# Altium PCB HX-SMJ01.pcbdoc (part 3 of 3)
Units mm, origin at the board's own origin, x right, y up, seen from the top; angles counter-clockwise.
Board outline 198.63 x 136.78 mm, 2 copper layers (Top Layer, Bottom Layer); 359 components, 358 nets, 1307 pads, 814 vias.
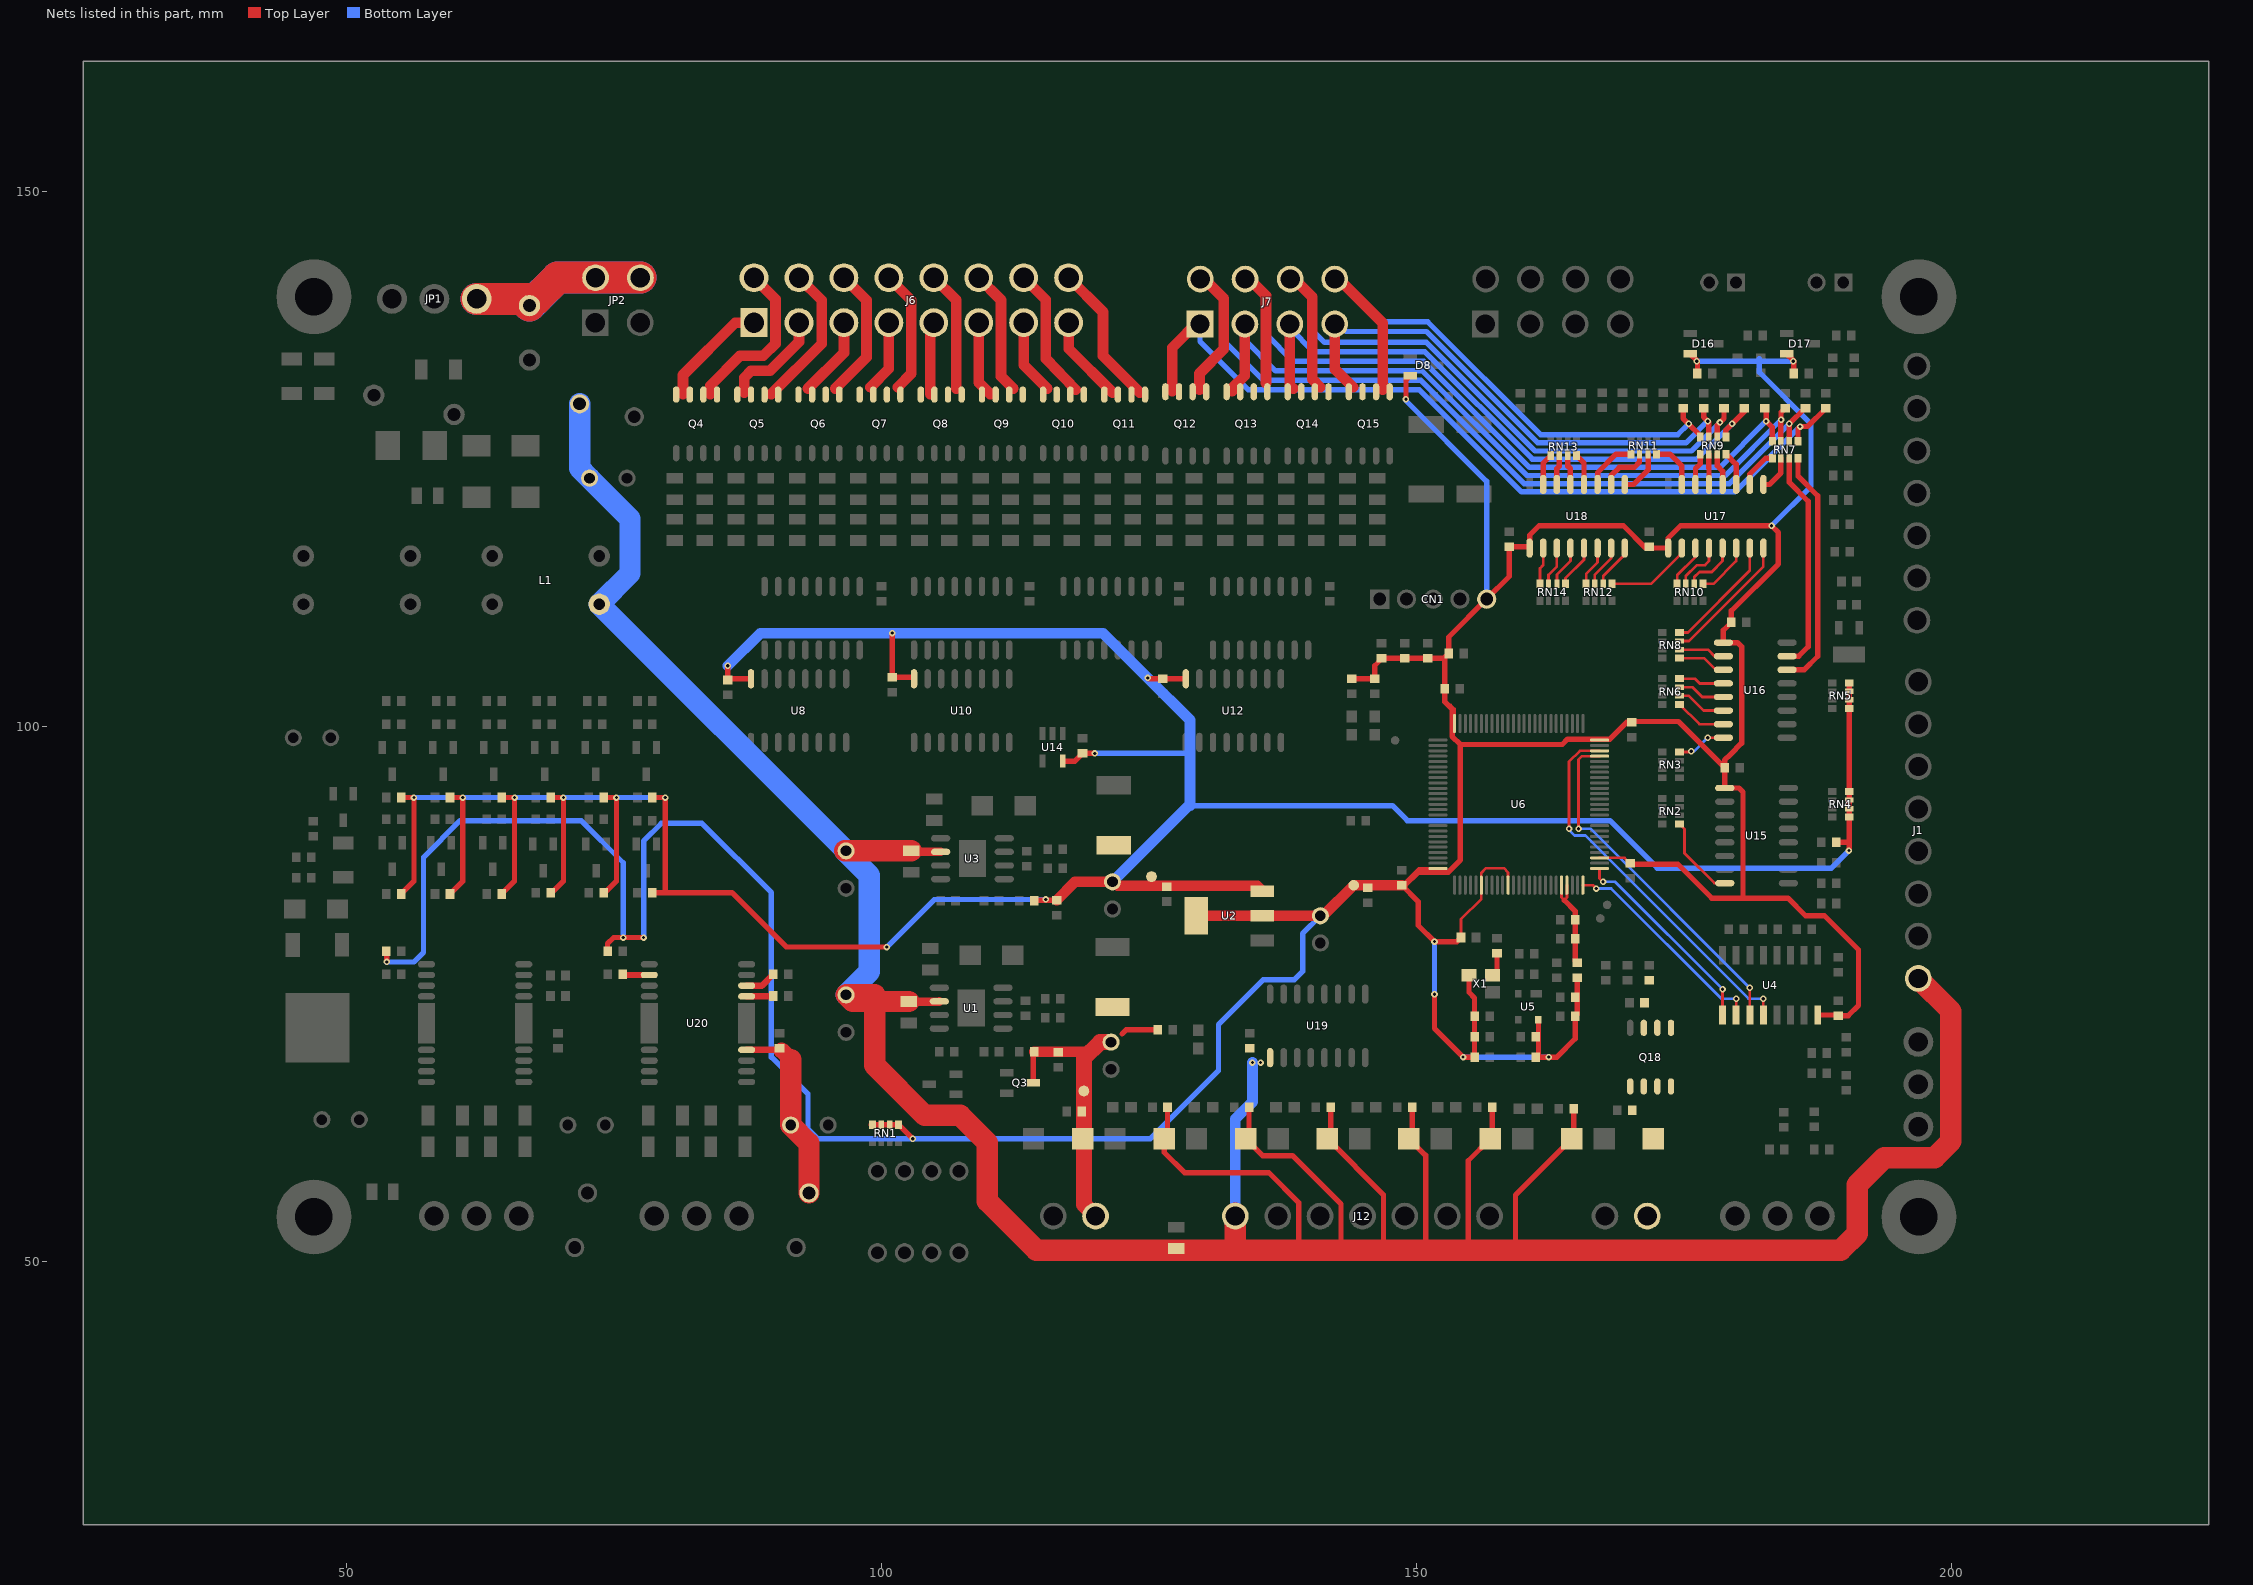
[diagram p3: the nets of this part, all layers, seen from the top]

## Via types
v1: diameter 0.61, hole 0.305, Top Layer to Bottom Layer, 814 vias

## Nets (pads, with @x,y where several pads share a name; then routed paths per layer and width w, separated by ;. In a path a pad name is that pad's centre, name@x,y a point inside that pad or via, vN(x,y) a via of type N, cw(c..) or ccw(c..) an arc to the next point about the centre after c; other vN are vias at no path point) (continued)
U15_16: RN2.5 U15.16 | length 7.8
  Top Layer w0.254: RN2.5@174.575,90.904 175.045,90.435 175.045,88.167 177.839,85.373 U15.16@178.804,85.373
U16_6: RN7.4 U16.6 | length 22.7
  Top Layer w0.5: U16.6@184.621,105.312 186.221,105.312 187.491,106.582 187.491,121.568 185.642,123.417 RN7.4@185.642,125.086
U16_7: RN7.3 U16.7 | length 20.7
  Top Layer w0.5: U16.7@184.621,106.582 185.713,106.582 186.602,107.471 186.602,121.06 184.844,122.82 RN7.3@184.844,125.086
U16_10: RN8.6 U16.10 | length 4.4
  Top Layer w0.254: RN8.6@174.575,107.198 177.222,107.199 177.839,106.582 U16.10@178.677,106.582
U16_11: RN8.5 U16.11 | length 4.6
  Top Layer w0.254: RN8.5@174.575,106.398 176.879,106.399 177.966,105.312 U16.11@178.677,105.312
U16_12: RN6.8 U16.12 | length 4.3
  Top Layer w0.254: RN6.8@174.575,104.479 176.025,104.479 176.465,104.042 U16.12@178.677,104.042
U16_13: RN6.7 U16.13 | length 4.5
  Top Layer w0.254: RN6.7@174.575,103.68 175.787,103.681 176.696,102.772 U16.13@178.677,102.772
U16_14: RN6.6 U16.14 | length 4.7
  Top Layer w0.254: RN6.6@174.575,102.88 175.444,102.881 176.823,101.502 U16.14@178.677,101.502
U16_15: RN6.5 U16.15 | length 4.9
  Top Layer w0.254: RN6.5@174.575,102.08 176.424,100.232 U16.15@178.677,100.232
U16_16: RN3.8 U16.16 | length 4.7
  Top Layer w0.254: RN3.8@174.575,97.621 175.609,97.621 v1(175.68,97.692) ; v1(177.204,98.962) U16.16@178.677,98.962
  Bottom Layer w0.254: v1(175.68,97.692) 175.934,97.692 v1(177.204,98.962)
U17_1: RN7.2 U17.1 | length 3.5
  Top Layer w0.5: U17.1@182.411,122.635 182.97,122.635 184.042,123.707 RN7.2@184.042,125.086
U17_2: RN7.1 U17.2 | length 3.7
  Top Layer w0.5: U17.2@181.141,122.635 181.141,123.6 182.627,125.086 RN7.1@183.244,125.086
U17_3: RN9.4 U17.3 | length 3.2
  Top Layer w0.5: RN9.4@178.911,125.467 179.871,124.507 U17.3@179.871,122.635
U17_4: RN9.3 U17.4 | length 3
  Top Layer w0.5: RN9.3@178.113,125.467 178.113,124.38 178.601,123.854 U17.4@178.601,122.635
U17_5: RN9.2 U17.5 | length 2.8
  Top Layer w0.5: RN9.2@177.311,125.467 U17.5@177.331,122.635
U17_6: RN9.1 U17.6 | length 3
  Top Layer w0.5: U17.6@176.061,122.635 176.061,124.108 176.513,124.56 RN9.1@176.513,125.467
U17_7: RN11.4 U17.7 | length 4.5
  Top Layer w0.5: RN11.4@172.434,125.467 173.686,125.467 174.791,124.362 U17.7@174.791,122.635
U17_10: RN12.5 U17.10 | length 8.2
  Top Layer w0.254: RN12.5@168.243,113.351 171.908,113.351 174.791,116.234 U17.10@174.791,116.691
U17_11: RN10.8 U17.11 | length 4
  Top Layer w0.254: RN10.8@174.354,113.351 174.354,114.146 176.061,115.853 U17.11@176.061,116.691
U17_12: RN10.7 U17.12 | length 4.7
  Top Layer w0.254: RN10.7@175.152,113.351 175.152,114.055 176.188,115.091 176.95,115.091 177.331,115.472 U17.12@177.331,116.691
U17_13: RN10.6 U17.13 | length 5.1
  Top Layer w0.254: RN10.6@175.953,113.351 175.954,113.968 176.442,114.456 177.585,114.456 178.601,115.472 U17.13@178.601,116.691
U17_14: RN10.5 U17.14 | length 5.2
  Top Layer w0.254: RN10.5@176.752,113.351 177.75,113.351 179.871,115.472 U17.14@179.871,116.691
U17_15: RN8.8 U17.15 | length 11.1
  Top Layer w0.254: RN8.8@174.575,108.797 175.355,108.797 181.141,114.583 U17.15@181.141,116.691
U17_16: RN8.7 U17.16 | length 12.4
  Top Layer w0.254: RN8.7@174.575,107.997 175.444,107.997 182.411,114.964 U17.16@182.411,116.691
U18_1: RN11.3 U18.1 | length 4.2
  Top Layer w0.5: U18.1@169.457,122.635 170.27,122.635 171.636,124.001 RN11.3@171.636,125.467
U18_2: RN11.2 U18.2 | length 4.7
  Top Layer w0.5: U18.2@168.187,122.635 168.187,123.473 168.949,124.235 170.346,124.235 170.834,124.725 RN11.2@170.834,125.467
U18_3: RN11.1 U18.3 | length 4.9
  Top Layer w0.5: U18.3@166.917,122.635 166.917,123.727 168.657,125.467 RN11.1@170.036,125.467
U18_4: RN13.4 U18.4 | length 3
  Top Layer w0.5: RN13.4@164.941,125.34 165.647,124.634 U18.4@165.647,122.635
U18_5: RN13.3 U18.5 | length 2.8
  Top Layer w0.5: RN13.3@164.143,125.34 164.143,124.344 164.377,124.108 U18.5@164.377,122.635
U18_6: RN13.2 U18.6 | length 2.8
  Top Layer w0.5: U18.6@163.107,122.635 163.107,124.108 163.341,124.342 RN13.2@163.341,125.34
U18_7: RN13.1 U18.7 | length 3
  Top Layer w0.5: U18.7@161.837,122.635 161.837,124.634 RN13.1@162.543,125.34
U18_10: RN14.8 U18.10 | length 3.1
  Top Layer w0.254: RN14.8@161.527,113.351 161.527,114.794 161.837,115.104 U18.10@161.837,116.31
U18_11: RN14.7 U18.11 | length 3.7
  Top Layer w0.254: RN14.7@162.325,113.351 162.325,114.184 163.107,114.964 U18.11@163.107,116.691
U18_12: RN14.6 U18.12 | length 3.9
  Top Layer w0.254: RN14.6@163.126,113.351 163.127,114.22 164.377,115.472 U18.12@164.377,116.691
U18_13: RN14.5 U18.13 | length 4.1
  Top Layer w0.254: RN14.5@163.925,113.351 163.925,113.877 165.647,115.599 U18.13@165.647,116.691
U18_14: RN12.8 U18.14 | length 3.8
  Top Layer w0.254: RN12.8@165.845,113.351 165.845,114.273 166.917,115.345 U18.14@166.917,116.691
U18_15: RN12.7 U18.15 | length 4
  Top Layer w0.254: RN12.7@166.643,113.351 166.643,114.184 168.187,115.726 U18.15@168.187,116.691
U18_16: RN12.6 U18.16 | length 4.2
  Top Layer w0.254: RN12.6@167.444,113.351 167.445,114.093 169.457,116.107 U18.16@169.457,116.691
U20_2: R124.2 U20.2 | length 2.5
  Top Layer w0.6: R124.2@75.797,76.864 75.868,76.793 U20.2@78.293,76.793
U20_12: C94.2 C95.1 F3.2 U20.12 | length 17.5
  Top Layer w0.6: U20.12@87.392,69.793 90.313,69.793 C94.2@90.463,69.94
  Top Layer w1.5: C94.2@90.664,69.739 91.507,68.896
  Top Layer w2: 91.507,68.897 C95.1@91.507,62.767 93.222,61.052 F3.2@93.222,56.427
U20_13: R126.1 U20.13 | length 2.5
  Top Layer w0.6: U20.13@87.392,74.791 89.851,74.791 R126.1@89.891,74.832
U20_14: R127.2 U20.14 | length 2.9
  Top Layer w0.6: U20.14@87.392,75.792 88.82,75.792 R127.2@89.891,76.864
USART1_RX_PA3: U4.9 U6.26 | length 19.1
  Top Layer w0.254: U6.26@167.1,86.74 167.1,85.825 v1(167.425,85.5) ; U4.9@178.601,73.049 v1(178.601,75.467)
  Bottom Layer w0.254: v1(167.425,85.5) 168.568,85.5 v1(178.601,75.467)
USART1_RX_PB11: U4.12 U6.48 | length 35.9
  Top Layer w0.254: v1(164.25,90.453) 164.25,96.724 165.266,97.74 U6.48@167.1,97.74 ; U4.12@182.411,73.049 v1(182.411,74.578)
  Bottom Layer w0.254: v1(164.25,90.453) 164.25,90.326 164.758,89.818 165.774,89.818 181.014,74.578 v1(182.411,74.578)
USART1_TX_PA2: U4.10 U6.25 | length 20.2
  Top Layer w0.254: U6.25@165.55,85.19 166.465,85.19 v1(166.79,84.865) ; U4.10@179.871,73.049 v1(179.871,74.578)
  Bottom Layer w0.254: v1(166.79,84.865) 168.187,84.865 178.474,74.578 v1(179.871,74.578)
USART1_TX_PB10: U4.11 U6.47 | length 33.3
  Top Layer w0.254: v1(165.139,90.453) 165.139,96.93 165.449,97.24 U6.47@167.1,97.24 ; U4.11@181.141,73.049 v1(181.141,75.594)
  Bottom Layer w0.254: v1(165.139,90.453) 166.282,90.453 v1(181.141,75.594)
VCC: F1.1 JP1.1 JP2.2 JP2.4 | length 33.6
  Top Layer w3: JP1.1@62.167,139.983 F1.1@66.46,139.983 ; F1.1@67.095,139.348 F1.1@66.46,139.983 ; JP2.4@77.461,141.957 69.704,141.957 67.73,139.983 F1.1@66.46,139.983
  Bottom Layer w3: JP1.1@62.167,139.983 66.46,139.983 F1.1@67.095,139.348 69.704,141.957 JP2.4@77.461,141.957
VDD_3V3: C21.1 C22.2 C30.1 C37.1 C38.1 C39.2 C40.1 C41.1 C42.2 C43.1 C44.1 C45.1 C46.1 C47.1 C48.1 C62.2 C72.2 C81.2 C90.2 CN1.5 D8.2 D16.2 D17.2 pad.1@144.118,85.18 R10.2 R15.2 R16.2 R17.2 R18.2 R22.2 R24.1 R122.2 R123.2 R132.2 R135.2 RN1.1 RN1.2 RN1.3 RN1.4 U2.2 U2.4 U4.16 U5.4 U6.6 U6.11 U6.28 U6.50 U6.75 U6.100 U15.9 U16.9 U17.9 U18.9 X1.1 X1.4 | length 498.8
  Top Layer w0.254: C45.1@148.629,85.18 150.186,86.74 U6.100@152.001,86.739 ; 152.914,102.043 153.168,102.043 153.552,101.66 U6.75@153.552,100.288 ; C48.1@154.151,80.293 154.151,82.005 156.051,83.905 U6.6@156.051,84.809 ; U6.6@156.051,85.189 156.051,86.348 156.473,86.77 158.154,86.77 158.55,86.374 U6.11@158.55,85.952 ; U6.28@167.1,87.738 169.442,87.738 C46.1@169.965,87.217 ; U6.50@167.1,98.739 167.963,98.739 169.65,100.425 C43.1@170.092,100.425
  Top Layer w0.5: R123.2@53.694,79.023 53.76,78.957 v1(53.76,78.007) ; R122.2@74.395,79.023 74.395,79.719 74.969,80.293 v1(75.858,80.293) v1(77.763,80.293) ; RN1.4@99.043,62.805 101.568,62.805 102.876,61.497 v1(102.909,61.497) ; R10.2@143.93,104.489 146.089,104.489 146.089,105.693 146.785,106.389 R16.2@148.883,106.389 ; R17.2@146.724,106.389 151.042,106.389 152.627,106.389 C44.1@152.627,103.534 ; v1(149.01,130.585) 149.01,132.409 D8.2@149.411,132.81 ; v1(151.677,74.98) 151.677,71.784 v1(154.344,69.117) 155.421,69.117 155.421,74.647 X1.1@154.895,75.175 X1.4@154.895,76.775 ; C48.1@154.151,80.293 153.77,79.912 v1(151.677,79.912) 150.153,81.436 150.153,83.659 148.629,85.18 148.944,85.18 150.153,86.389 152.947,86.389 154.09,87.532 154.09,98.327 ; U5.4@161.39,72.616 161.39,69.366 R18.2@161.141,69.117 v1(162.345,69.117) 163.107,69.117 164.824,70.834 C42.2@164.824,72.927 165.012,73.115 R24.1@165.012,76.544 ; C46.1@169.965,87.217 170.031,87.151 171.489,87.151 174.41,87.151 177.585,83.976 180.506,83.976 ; D16.2@175.573,134.842 176.249,134.167 R132.2@176.249,132.998 ; 182.03,83.976 180.506,83.976 ; D17.2@184.59,134.842 185.266,134.167 R135.2@185.266,132.998 ; U4.16@187.491,73.049 189.335,73.049 189.396,72.988 190.346,72.988 191.301,73.943 191.301,79.15 188.126,82.325 186.348,82.325 184.697,83.976 180.506,83.976 ; C44.1@152.627,103.534 152.627,106.455 153.008,106.836 153.008,108.375 CN1.5@156.551,111.916 158.662,114.027 158.662,116.803 160.455,116.803 U18.9@160.567,116.691 160.567,117.885 161.456,118.774 169.33,118.774 171.413,116.691 U17.9@173.521,116.691 173.521,117.631 174.664,118.774 v1(183.173,118.774) 183.808,118.139 183.808,115.218 179.424,110.834 179.424,109.757 178.677,109.01 U16.9@178.677,107.852 179.998,107.852 180.379,107.471 180.379,98.454 179.333,97.408 178.789,96.864 C62.2@178.789,96.168 ; C44.1@152.627,103.534 152.627,102.33 153.328,101.629 153.328,99.089 154.09,98.327 ; 154.09,98.327 163.615,98.327 164.123,98.835 168.06,98.835 168.398,99.173 169.65,100.425 170.092,100.425 170.092,100.486 171.489,100.486 174.471,100.486 C62.2@178.789,96.168 ; C62.2@178.789,96.168 U15.9@178.804,94.263 180.125,94.263 180.506,93.882 180.506,83.976
  Top Layer w1: U2.4@129.401,82.325 C21.1@141.009,82.325 ; C21.1@140.438,82.325 141.263,82.325 pad.1@144.118,85.18 C45.1@148.629,85.18
  Bottom Layer w0.5: v1(53.76,78.007) 56.31,78.007 57.189,78.886 57.189,87.786 60.618,91.215 71.921,91.215 75.858,87.278 v1(75.858,80.293) ; v1(77.763,80.293) 77.763,89.31 79.414,90.961 83.224,90.961 89.701,84.484 89.701,69.117 93.13,65.688 93.13,62.386 94.019,61.497 v1(102.909,61.497) 125.134,61.497 131.484,67.847 131.484,72.165 135.675,76.356 138.596,76.356 139.358,77.118 139.358,80.674 C21.1@141.009,82.325 ; v1(149.01,130.585) 149.01,130.458 156.55,122.918 CN1.5@156.551,111.916 ; v1(151.677,74.98) v1(151.677,79.912) ; v1(154.344,69.117) v1(162.345,69.117) ; v1(176.188,134.141) v1(185.205,134.141) ; 182.035,134.395 182.035,133.12 186.856,128.299 186.856,122.457 v1(183.173,118.774)
VDD_5V: C23.1 C24.2 C25.2 C52.1 C54.1 C55.1 C58.1 L4.2 pad.1@125.226,85.986 R9.2 R80.2 R92.1 R93.1 R94.1 R95.2 R96.2 R97.2 R107.1 R108.1 R109.1 R110.2 R111.2 R112.2 RN4.5 RN4.6 RN4.7 RN4.8 RN5.5 RN5.6 RN5.7 RN5.8 U2.3 U8.16 U10.16 U12.16 U14.5 | length 323.4
  Top Layer w0.5: R108.1@55.096,84.357 56.3,85.561 v1(56.3,93.374) R111.2@55.096,93.374 ; R107.1@59.668,84.357 60.872,85.561 v1(60.872,93.374) R110.2@59.668,93.374 ; R109.1@64.494,84.357 65.698,85.561 v1(65.698,93.374) R112.2@64.494,93.374 ; R93.1@69.066,84.357 70.27,85.561 v1(70.27,93.374) R96.2@69.066,93.374 ; R92.1@74.019,84.357 75.223,85.561 v1(75.223,93.374) R95.2@74.019,93.374 ; R94.1@78.565,84.484 86.018,84.484 91.098,79.404 v1(100.496,79.404) ; R97.2@78.591,93.374 v1(79.795,93.374) 79.795,84.484 ; v1(85.637,105.693) 85.637,104.362 85.749,104.474 U8.16@87.796,104.474 ; v1(101.004,108.741) 101.004,104.616 102.894,104.616 U10.16@103.036,104.474 ; R9.2@114.278,83.722 114.342,83.788 C25.2@116.371,83.788 ; U14.5@116.93,96.778 118.063,96.778 118.784,97.499 v1@119.927,97.499 ; v1(124.88,104.55) 124.941,104.489 126.277,104.489 U12.16@128.436,104.474 ; R80.2@189.208,89.183 190.45,89.183 ; v1(190.412,88.421) 190.45,88.459 RN4.5@190.45,91.539 RN4.8@190.45,93.938 ; RN4.8@190.45,94.192 RN5.6@190.45,102.499 ; RN5.5@190.45,101.699 RN5.8@190.45,104.098
  Top Layer w1: C25.2@116.371,83.788 118.083,85.5 C23.1@121.578,85.5 ; C23.1@122.086,85.119 135.104,85.119 U2.3@135.599,84.624
  Bottom Layer w0.5: v1(56.3,93.374) v1(79.795,93.374) ; v1(100.496,79.404) 104.941,83.849 v1(115.355,83.849) ; v1(119.927,97.5) 128.817,97.5 ; 128.69,92.612 147.74,92.612 149.137,91.215 168.06,91.215 172.505,86.77 188.761,86.77 v1(190.412,88.421)
  Bottom Layer w1: v1(85.637,105.693) 88.685,108.741 120.689,108.741 v1(124.88,104.55) 128.817,100.613 128.817,92.612 ; C23.1@121.578,85.5 128.69,92.612
VDD_12V: C12.1 C13.2 C14.2 D6.1 J11.2 L3.2 pad.1@118.911,65.946 Q3.3 R6.2 R140.1 | length 31.4
  Top Layer w0.5: Q3.3@114.192,66.704 114.192,69.539 R6.2@114.278,69.625 ; 122.467,71.276 122.848,71.657 R140.1@125.83,71.657
  Top Layer w1: R6.2@114.278,69.625 119.546,69.625 120.435,70.514
  Top Layer w1.5: J11.2@120.002,54.258 118.911,55.35 pad.1@118.911,65.946 118.911,68.99 120.435,70.514 C12.1@121.451,70.514
VDD_24V: C3.1 C4.2 C11.2 C15.1 C20.2 C26.1 C91.2 C93.2 D10.1 D11.1 D12.1 D13.1 D14.1 D15.1 F2.1 J1.1 J12.1 L1.4 Q18.1 Q18.2 Q18.3 R83.1 R86.2 R87.2 R88.2 R89.2 R90.2 R91.2 U1.2 U3.2 U19.9 | length 351
  Top Layer w0.5: R86.2@126.724,64.418 126.724,61.802 126.419,61.497 126.419,60.212 128.309,58.322 136.183,58.322 138.977,55.528 138.977,51.21 139.104,51.083 ; R87.2@134.344,64.418 134.344,61.802 134.039,61.497 135.622,59.912 138.403,59.912 142.944,55.371 142.944,51.083 ; R88.2@141.964,64.418 141.964,61.802 141.659,61.497 146.907,56.247 146.907,51.083 ; R89.2@149.584,64.418 149.584,61.802 149.279,61.497 150.844,59.93 150.844,51.083 ; 154.832,51.083 154.832,59.43 156.899,61.497 157.077,61.675 R90.2@157.077,64.418 ; 159.251,51.083 159.251,56.232 164.519,61.497 164.697,61.675 R91.2@164.697,64.291
  Top Layer w0.8: C11.2@102.527,74.308 105.383,74.309 U1.2@105.398,74.324 ; C20.2@102.781,88.405 102.894,88.294 U3.2@105.525,88.294
  Top Layer w2: C26.1@96.559,88.393 102.769,88.393 C20.2@102.781,88.405 ; C11.2@102.527,74.308 97.308,74.309 C15.1@96.686,74.931 99.353,74.931 99.353,68.355 104.042,63.666 107.344,63.666 109.894,61.116 109.894,55.655 114.466,51.083 130.399,51.083 137.704,51.083 189.65,51.083 191.174,52.607 191.174,57.179 193.714,59.719 198.413,59.719 199.937,61.243 199.937,73.417 J1.1@196.889,76.465 ; 133.066,51.21 J12.1@133.066,54.512
  Bottom Layer w1: J12.1@133.066,54.512 133.066,63.333 134.659,64.926 v1(134.659,68.609)
  Bottom Layer w2: F2.1@71.784,130.169 71.784,124.146 C3.1@72.711,123.219 76.493,119.437 76.493,114.318 L1.4@73.619,111.444 ; L1.4@73.62,111.444 C26.1@96.686,88.393 ; C26.1@96.559,88.393 98.845,86.107 98.845,77.09 C15.1@96.686,74.931
  other v1: 135.421,68.609
VDD_24V_LED: C92.2 D9.1 J10.2 Q18.5 Q18.6 Q18.7 Q18.8
VDDA_3V3: C49.1 C50.1 R24.2 U6.21 U6.22 | length 9.4
  Top Layer w0.254: U6.21@163.551,85.189 163.552,84.04 163.803,83.788 164.052,84.035 U6.22@164.051,85.189
  Top Layer w0.5: 163.803,83.788 164.824,82.767 C49.1@164.824,81.944 164.824,78.134 R24.2@165.012,77.946
X1: J6.1 Q4.7 Q4.8 | length 10.4
  Top Layer w1: 81.446,131.093 81.446,132.871 86.33,137.756 J6.1@88.082,137.755
X1_3: R21.2 X1.3 | length 2.2
  Top Layer w0.5: X1.3@157.095,76.775 157.519,77.199 R21.2@157.519,78.83
X2: J6.2 Q4.5 Q4.6 | length 15.5
  Top Layer w1: 83.986,131.093 83.986,131.855 86.78,134.649 88.939,134.649 90.082,135.792 90.082,139.955 J6.2@88.082,141.955
X3: J6.3 Q5.7 Q5.8 | length 9.7
  Top Layer w1: 87.161,131.22 87.161,132.617 87.796,133.252 89.574,133.252 92.282,135.96 J6.3@92.282,137.756
X4: J6.4 Q5.5 Q5.6 | length 13.7
  Top Layer w1: 89.701,131.093 94.4,135.792 94.4,139.838 J6.4@92.282,141.955
X5: J6.5 Q6.7 Q6.8 | length 7.5
  Top Layer w1: 93.13,131.601 96.482,134.953 J6.5@96.482,137.756
X6: J6.6 Q6.5 Q6.6 | length 12.4
  Top Layer w1: 95.67,131.601 98.591,134.522 98.591,139.847 J6.6@96.482,141.955
X7: J6.7 Q7.7 Q7.8 | length 6.7
  Top Layer w1: 98.972,131.728 100.681,133.438 100.681,133.565 J6.7@100.682,137.755
X8: J6.8 Q7.5 Q7.6 | length 11.6
  Top Layer w1: J6.8@100.682,141.955 102.782,139.856 102.782,132.998 101.512,131.728
X9: J6.9 Q8.7 Q8.8 | length 6.8
  Top Layer w1: 104.56,131.093 104.56,137.434 J6.9@104.882,137.756
X10: J6.10 Q8.5 Q8.6 | length 11.2
  Top Layer w1: J6.10@104.882,141.955 106.973,139.865 106.973,131.601
X11: J6.11 Q9.7 Q9.8 | length 7.1
  Top Layer w1: J6.11@109.082,137.756 109.082,132.159 110.148,131.093
X12: J6.12 Q9.5 Q9.6 | length 11.7
  Top Layer w1: J6.12@109.082,141.955 111.164,139.874 111.164,132.744 112.307,131.601
X13: J6.13 Q10.7 Q10.8 | length 7.1
  Top Layer w1: J6.13@113.282,137.756 113.282,133.801 115.482,131.601
X14: J6.14 Q10.5 Q10.6 | length 12.5
  Top Layer w1: J6.14@113.282,141.955 115.355,139.884 115.355,134.395 118.149,131.474
X15: J6.15 Q11.7 Q11.8 | length 8.2
  Top Layer w1: J6.15@117.482,137.756 117.482,135.316 121.578,131.22
X16: J6.16 Q11.5 Q11.6 | length 13.5
  Top Layer w1: J6.16@117.482,141.955 120.689,138.749 120.689,134.649 124.118,131.22
Y1: C73.2 J7.1 Q12.7 Q12.8 RN7.5 | length 78.7
  Top Layer w0.5: RN7.5@185.642,126.686 185.642,127.847 v1(185.84,128.045) 186.541,128.045 C73.2@188.253,129.757
  Top Layer w1: 127.166,131.347 127.166,135.421 J7.1@129.754,138.01
  Bottom Layer w0.5: J7.1@129.754,138.01 129.754,135.998 134.278,131.474 150.28,131.474 159.805,121.949 179.744,121.949 v1(185.84,128.045)
Y2: C74.2 J7.2 Q12.5 Q12.6 RN7.6 | length 84.1
  Top Layer w0.5: RN7.6@184.843,126.686 184.844,128.279 v1(184.824,128.299) 186.282,129.757 C74.2@186.348,129.757
  Top Layer w1: 129.706,131.474 129.706,132.998 131.992,135.284 131.992,140.005 J7.2@129.787,142.211
  Bottom Layer w0.5: J7.2@129.787,142.211 131.992,140.009 131.992,136.046 135.675,132.363 150.407,132.363 160.059,122.711 179.236,122.711 v1(184.824,128.299)
Y3: C75.2 J7.3 Q13.7 Q13.8 RN7.7 | length 69.8
  Top Layer w0.5: RN7.7@184.042,126.686 184.042,128.66 v1(184.062,128.68) 184.062,129.376 C75.2@184.443,129.757
  Top Layer w1: 132.754,131.347 132.754,131.601 133.955,132.803 J7.3@133.955,138.01
  Bottom Layer w0.5: J7.3@133.955,138.01 133.955,136.115 136.818,133.252 150.534,133.252 160.313,123.473 178.855,123.473 v1(184.062,128.68)
Y4: C76.2 J7.4 Q13.5 Q13.6 RN7.8 | length 74.3
  Top Layer w0.5: C76.2@182.538,129.757 182.665,129.63 v1(182.665,128.553) 183.244,127.974 RN7.8@183.243,126.686
  Top Layer w1: J7.4@133.975,142.211 135.929,140.257 135.929,132.109
  Bottom Layer w0.5: J7.4@133.976,142.211 135.929,140.257 135.929,136.681 138.469,134.141 150.661,134.141 160.567,124.235 178.347,124.235 v1(182.665,128.553)
Y5: C77.2 J7.5 Q14.7 Q14.8 RN9.5 | length 58.4
  Top Layer w0.5: RN9.5@178.911,127.194 178.911,127.72 v1(179.49,128.299) 180.633,129.442 C77.2@180.633,129.757
  Top Layer w1: J7.5@138.157,138.01 138.157,131.914 138.469,131.601
  Bottom Layer w0.5: J7.5@138.157,138.01 138.157,137.248 140.374,135.03 150.788,135.03 160.821,124.997 176.188,124.997 v1(179.49,128.299)
Y6: C78.2 J7.6 Q14.5 Q14.6 RN9.6 | length 64.4
  Top Layer w0.5: RN9.6@178.113,127.194 178.113,128.192 v1(178.347,128.426) 178.728,128.807 C78.2@178.728,129.757
  Top Layer w1: J7.6@138.186,142.211 140.247,140.15 140.247,132.49 141.009,131.728
  Bottom Layer w0.5: J7.6@138.187,142.211 140.247,140.161 140.247,137.062 141.39,135.919 150.915,135.919 161.075,125.759 175.68,125.759 v1(178.347,128.426)
Y7: C79.2 J7.7 Q15.7 Q15.8 RN9.7 | length 50.2
  Top Layer w0.5: C79.2@176.823,129.757 176.823,128.934 v1(177.204,128.553) 177.311,128.446 RN9.7@177.311,127.194
  Top Layer w1: J7.7@142.357,138.01 142.357,133.428 144.057,131.728
  Bottom Layer w0.5: J7.7@142.358,138.01 143.432,136.935 150.915,136.935 161.329,126.521 175.172,126.521 v1(177.204,128.553)
Y8: C80.2 J7.8 Q15.5 Q15.6 RN9.8 | length 55.5
  Top Layer w0.5: C80.2@174.918,129.757 174.918,128.807 v1(175.426,128.299) 176.513,127.212 RN9.8@176.513,127.194
  Top Layer w1: J7.8@142.357,142.211 146.851,137.717 146.851,131.474
  Bottom Layer w0.5: J7.8@142.358,142.211 146.744,137.824 151.042,137.824 161.583,127.283 174.41,127.283 v1(175.426,128.299)
pads on no net: U3.3 U6.5 U6.13 U6.23 U6.24 U6.37 U6.38 U6.51 U6.73 U6.77 U6.89 U11.3 U11.4 U11.5 U11.6 U11.11 U11.12 U11.13 U11.14 U14.1 U20.6 U20.9 U20.11 U20.16 U21.6 U21.9 U21.11 U21.16
copper on no net: | length 16.8
  Top Layer w0.254: 148.121,98.581 148.463,98.239 152.001,98.239 ; 164.552,85.19 164.552,83.928 166.409,82.071 167.171,82.071 ; 165.05,85.19 165.05,84.192 165.901,83.341 167.806,83.341 ; 167.101,92.239 168.695,92.239 ; 167.101,92.739 169.203,92.739 169.457,92.485

## Polygon pours and split planes (outlines as drawn)
DGND on Bottom Layer (solid): 39.878,149.479 205.232,149.479 211.328,143.383 211.328,39.116 210.312,38.1 38.735,38.1 38.1,38.735
DGND on Top Layer (solid): 39.878,149.479 205.232,149.479 211.328,143.383 211.328,39.116 210.312,38.1 38.735,38.1 38.1,38.735

## Keep-outs
Keep-Out Layer:
  lines w0.254: 41.949,54.178 ccw(c46.949,54.178) 46.949,49.178 ; 41.949,140.178 cw(c46.949,140.178) 46.949,145.178 ; 196.949,49.178 ccw(c196.949,54.178) 201.949,54.178 ; 196.949,145.178 cw(c196.949,140.178) 201.949,140.178

## Other copper
Top Layer:
  drawing of 1219 lines, arcs and shapes, not listed
Bottom Layer:
  region net VDD_24V: 134.659,67.847 134.913,67.212 135.548,67.847 136.31,68.609 136.31,69.371 135.802,69.879 134.405,69.879 134.151,69.625 134.151,68.355 134.278,67.466
  region net PGND: 83,52.887 81.32,54.147 80.764,53.34 82.38,52.127
  region net PGND: 63.192,53.332 61.092,53.332 61.142,52.352 63.142,52.352
  region net NPN_IR: 196.064,91.368 196.063,93.243 195.188,92.555 195.189,92.055
  region net NPN2_24V: 196.064,97.204 196.063,95.329 195.188,96.017 195.189,96.517
  region net NPN1_24V: 196.968,98.978 195.643,100.305 195.51,99.2 195.863,98.846
  region net SWCLK_PA14: 149.904,111.621 148.654,111.109 149.391,110.73 149.645,110.835
  region net SWDIO_PA13: 154.727,111.321 153.377,111.321 153.925,110.691 154.179,110.691
  region net VDD_3V3: 157.226,112.512 155.876,112.511 156.3,113.141 156.8,113.142
  region net Y2: 131.006,142.105 129.908,140.586 131.018,140.628 131.315,141.038
  region net Y3: 134.893,136.802 133.018,136.802 133.705,136.115 134.205,136.115
  region net Y4: 135.195,142.105 134.096,140.586 135.206,140.627 135.503,141.037
  region net Y5: 139.401,137.508 137.882,136.409 138.949,136.101 139.359,136.398
  region net Y6: 139.406,142.108 138.311,140.586 139.421,140.63 139.716,141.042
  region net Y7: 143.561,137.968 142.544,136.393 143.294,136.72 143.571,137.15
  region net Y8: 143.577,142.105 142.478,140.586 143.588,140.627 143.885,141.037
  region net SW2: 157.705,141.908 156.379,140.582 157.483,140.449 157.837,140.803
  region net SW3: 161.563,136.801 159.688,136.802 160.375,135.927 160.875,135.927
  region net SW4: 161.893,141.908 160.567,140.582 161.672,140.449 162.026,140.803
  region net SW5: 165.764,136.801 163.889,136.802 164.576,135.927 165.076,135.927
  region net SW6: 166.105,141.908 164.778,140.582 165.883,140.449 166.237,140.803
  region net SW7: 169.965,136.801 168.09,136.802 168.777,135.927 169.277,135.927
  region net SW8: 170.275,141.908 168.949,140.582 170.054,140.449 170.408,140.803
  region net SW1_DETECT_IN: 196.84,112.655 195.514,113.981 195.382,112.876 195.735,112.522
  region net SW2_DETECT_IN: 196.84,116.614 195.514,117.94 195.382,116.835 195.735,116.482
  region net SW3_DETECT_IN: 195.935,120.885 195.935,122.76 195.06,122.072 195.06,121.572
  region net SW4_DETECT_IN: 195.935,124.845 195.935,126.72 195.06,126.032 195.06,125.532
  region net SW5_DETECT_IN: 195.935,128.804 195.935,130.679 195.06,129.992 195.06,129.492
  region net SW6_DETECT_IN: 196.84,132.454 195.514,133.78 195.382,132.675 195.735,132.322
  region net VDD_24V: 134.004,55.085 132.129,55.085 132.566,55.96 133.566,55.96
  region net VDD_5V: 121.528,86.299 122.376,85.45 122.702,85.917 121.995,86.624
  region net VDD_3V3: 140.211,82.375 141.059,81.527 140.416,81.378 140.062,81.732
  region net NETPORT19: 99.551,59.347 100.505,58.393 100.563,59.226 100.384,59.405
  region net NETPORT18: 102.091,59.347 103.045,58.393 103.103,59.226 102.924,59.405
  region net NETPORT17: 104.631,59.347 105.585,58.393 105.643,59.226 105.464,59.405
  region net NETPORT16: 107.171,59.347 108.125,58.393 108.183,59.226 108.004,59.405
  region net D1_1: 72.621,115.881 73.682,116.942 73.363,117.614 71.949,116.2
  region net VDD_24V: 73.557,110.446 74.617,111.508 75.289,111.19 73.876,109.775
  region net VDD_24V: 73.556,112.442 74.617,111.382 75.289,111.7 73.875,113.114
  region net D1_1: 45.903,116.942 46.964,115.881 47.636,116.2 46.222,117.614
  region net PGND: 47.169,136.685 43.456,140.397 42.893,137.536 44.307,136.121
  region net PGND: 47.168,57.671 43.456,53.959 43.528,56.185 44.942,57.599
  region net PGND: 50.442,54.397 46.73,50.685 49.337,50.376 50.751,51.79
  region net INFRARED_PW_EN_PC9: 194.628,107.397 195.086,107.397 194.984,107.183 194.73,107.183
  region net USART1_RX_PA3: 178.62,75.771 178.297,75.448 178.218,75.671 178.397,75.85
  region net USART1_TX_PA2: 179.669,74.35 179.669,74.807 179.456,74.705 179.456,74.451
  region net USART1_RX_PA3: 167.627,85.272 167.627,85.729 167.84,85.627 167.84,85.373
  region net USART1_TX_PA2: 166.992,84.637 166.992,85.094 167.205,84.992 167.205,84.738
  region net USART1_RX_PB11: 182.209,74.35 182.209,74.807 181.996,74.705 181.996,74.451
  region net USART1_TX_PB10: 181.16,75.898 180.837,75.575 180.758,75.798 180.937,75.977
  region net USART1_RX_PB11: 164.166,90.16 164.551,90.406 164.583,90.173 164.363,90.033
  region net USART1_TX_PB10: 165.341,90.225 165.341,90.682 165.554,90.58 165.554,90.326
  region net VDD_5V: 115.153,83.621 115.153,84.078 114.94,84.099 114.94,83.599
  region net VDD_3V3: 183.477,118.755 183.154,119.078 183.29,119.244 183.643,118.891
  region net VDD_3V3: 176.39,133.913 176.39,134.37 176.603,134.391 176.603,133.891
  region net VDD_3V3: 185.003,133.913 185.003,134.37 184.79,134.391 184.79,133.891
  region net VDD_3V3: 151.448,75.181 151.906,75.181 151.927,75.395 151.427,75.395
  region net VDD_3V3: 151.448,79.711 151.906,79.711 151.927,79.497 151.427,79.497
  region net VDD_5V: 100.8,79.385 100.477,79.708 100.613,79.874 100.966,79.521
  region net VDD_5V: 190.431,88.117 190.108,88.44 189.942,88.304 190.295,87.951
  region net MOTOR_VDD_24V: 123,127.749 123.458,127.749 123.479,127.962 122.979,127.962
  region net MOTOR_VDD_24V: 123,127.345 123.458,127.345 123.479,127.132 122.979,127.132
  region net MOTOR_VDD_24V: 99.759,128.098 100.217,128.098 100.238,127.884 99.738,127.884
  region net MOTOR_VDD_24V: 114.872,128.098 115.33,128.098 115.351,127.884 114.851,127.884
  region net MOTOR_VDD_24V: 123,128.098 123.458,128.098 123.479,127.884 122.979,127.884
  region net MOTOR_VDD_24V: 127.82,114.633 127.497,114.31 127.331,114.446 127.684,114.799
  region net MOTOR_VDD_24V: 114.872,113.326 115.33,113.326 115.351,113.539 114.851,113.539
  region net MOTOR_VDD_24V: 99.759,114.531 100.217,114.531 100.238,114.744 99.738,114.744
  region net U16_16: 175.946,97.543 175.794,97.975 176.025,97.963 176.118,97.697
  region net U16_16: 177.223,98.658 176.9,98.981 176.821,98.759 177,98.579
  region net VDD_3V3: 148.926,130.292 149.311,130.538 149.449,130.373 149.017,130.098
  region net U1_3: 103.823,68.049 104.281,68.049 104.302,68.262 103.802,68.262
  region net VDD_5V: 120.129,97.271 120.129,97.729 120.342,97.75 120.342,97.25
  region net VDD_3V3: 77.534,80.495 77.992,80.495 78.013,80.708 77.513,80.708
  region net VDD_3V3: 75.629,80.495 76.087,80.495 76.108,80.708 75.608,80.708
  region net VDD_3V3: 53.962,77.779 53.962,78.236 54.175,78.257 54.175,77.757
  region net VDD_3V3: 102.707,61.269 102.707,61.726 102.494,61.747 102.494,61.247
  region net VDD_3V3: 103.111,61.269 103.111,61.726 103.324,61.747 103.324,61.247
  region net NETPORT16: 165.158,87.482 164.835,87.805 164.756,87.583 164.935,87.403
  region net NETPORT17: 164.523,88.117 164.2,88.44 164.121,88.218 164.3,88.038
  region net NETPORT18: 164.015,88.752 163.692,89.075 163.613,88.853 163.792,88.673
  region net NETPORT19: 162.878,89.236 163.336,89.236 163.234,89.022 162.98,89.022
  region net SW2_DETECT_IN: 186.246,95.1 186.704,95.1 186.725,95.313 186.225,95.313
  region net ADC2_P: 173.342,87.939 173.342,88.396 173.555,88.417 173.555,87.917
  region net ADC1_P: 172.58,88.701 172.58,89.158 172.793,89.179 172.793,88.679
  region net MOTOR_CURRENT_ADC: 171.818,89.463 171.818,89.92 172.031,89.941 172.031,89.441
  region net INFRARED_PW_EN_PC9: 169.863,91.522 170.321,91.522 170.219,91.308 169.965,91.308
  region net MOTOR2_IN2: 150.967,83.367 150.967,83.824 150.754,83.722 150.754,83.468
  region net 12V_PWM_EN_PB6: 109.182,67.104 108.859,66.781 109.082,66.702 109.261,66.882
  region net MOTOR_24V_PWM_EN_PB7: 146.903,90.225 146.903,90.682 146.69,90.58 146.69,90.326
  region net 12V_PWM_EN_PB6: 147.538,90.86 147.538,91.317 147.325,91.215 147.325,90.961
  region net MOTOR_24V_PWM_EN_PB7: 53.429,96.403 53.106,96.726 53.329,96.805 53.508,96.626
  region net MOTOR_CURRENT_ADC: 150.457,130.477 150.134,130.154 150.27,129.988 150.623,130.341
  region net SW1_DETECT_IN: 186.906,93.736 186.583,94.059 186.719,94.225 187.072,93.872
  region net NPN1_24V: 187.058,91.495 187.058,91.952 187.271,91.973 187.271,91.473
  region net NPN2_24V: 187.185,90.225 187.185,90.682 187.398,90.703 187.398,90.203
  region net NPN_IR: 186.804,88.955 186.804,89.412 187.017,89.433 187.017,88.933
  region net SW2_DETECT_IN: 186.677,98.734 186.677,99.191 186.89,99.212 186.89,98.712
  region net SW2_DETECT_IN: 186.246,98.761 186.704,98.761 186.725,98.547 186.225,98.547
  region net SW3_DETECT_IN: 187.287,100.213 186.964,100.536 187.1,100.702 187.453,100.349
  region net SW4_DETECT_IN: 187.287,101.483 186.964,101.806 187.1,101.972 187.453,101.619
  region net SW5_DETECT_IN: 187.287,102.753 186.964,103.076 187.1,103.242 187.453,102.889
  region net SW6_DETECT_IN: 187.287,104.023 186.964,104.346 187.1,104.512 187.453,104.159
  region net ADC2_P: 190.691,131.908 191.149,131.908 191.17,131.694 190.67,131.694
  region net ADC1_P: 183.82,133.147 183.668,132.716 183.854,132.599 184.037,133.122
  region net Y1: 185.859,127.741 185.536,128.064 185.37,127.928 185.723,127.575
  region net Y2: 184.843,127.995 184.52,128.318 184.354,128.182 184.707,127.829
  region net Y3: 184.081,128.376 183.758,128.699 183.592,128.563 183.945,128.21
  region net Y4: 182.684,128.249 182.361,128.572 182.195,128.436 182.548,128.083
  region net Y5: 179.509,127.995 179.186,128.318 179.02,128.182 179.373,127.829
  region net Y6: 178.366,128.122 178.043,128.445 177.877,128.309 178.23,127.956
  region net Y7: 177.223,128.249 176.9,128.572 176.734,128.436 177.087,128.083
  region net Y8: 175.445,127.995 175.122,128.318 174.956,128.182 175.309,127.829
  region net SW8: 172.276,128.628 172.734,128.628 172.755,128.841 172.255,128.841
  region net SW5: 168.587,128.73 168.264,128.407 168.098,128.543 168.451,128.896
  region net SW7: 171.254,128.984 170.931,128.661 170.765,128.797 171.118,129.15
  region net SW6: 169.984,128.857 169.661,128.534 169.495,128.67 169.848,129.023
  region net SW1: 161.856,128.603 161.533,128.28 161.367,128.416 161.72,128.769
  region net SW4: 164.783,128.755 165.241,128.755 165.262,128.968 164.762,128.968
  region net SW2: 162.999,128.73 162.676,128.407 162.51,128.543 162.863,128.896
  region net SW3: 164.142,128.857 163.819,128.534 163.653,128.67 164.006,129.023
  region net SWDIO_PA13: 154.369,105.514 154.827,105.514 154.725,105.727 154.471,105.727
  region net SWCLK_PA14: 149.289,99.418 149.747,99.418 149.645,99.631 149.391,99.631
  region net U1_3: 103.823,72.853 104.281,72.853 104.302,72.639 103.802,72.639
  region net J_NTRST: 149.791,92.408 149.468,92.085 149.389,92.308 149.568,92.487
  region net REALY_R1_P3: 143.243,73.08 143.243,73.537 143.456,73.435 143.456,73.181
  region net REALY_R1_P4: 142.202,76.502 141.879,76.179 142.102,76.1 142.281,76.28
  region net REALY_R1_P2: 144.64,72.445 144.64,72.902 144.853,72.8 144.853,72.546
  region net REALY_R1_P1: 146.291,71.81 146.291,72.267 146.504,72.165 146.504,71.911
  region net REALY_R1_P5: 138.24,77.574 138.698,77.574 138.596,77.787 138.342,77.787
  region net REALY_R1_P6: 137.351,77.574 137.809,77.574 137.707,77.787 137.453,77.787
  region net REALY_R1_P7: 136.462,77.574 136.92,77.574 136.818,77.787 136.564,77.787
  region net REALY_R1_P1: 162.649,82.979 162.326,82.656 162.509,82.616 162.689,82.796
  region net REALY_R1_P2: 161.735,81.997 162.193,81.997 162.091,81.783 161.837,81.783
  region net REALY_R1_P3: 161.173,81.174 161.608,81.314 161.583,81.082 161.329,81
  region net REALY_R1_P4: 160.592,80.346 161.05,80.346 160.948,80.132 160.694,80.132
  region net REALY_R1_P7: 155.92,82.732 155.92,83.189 155.707,83.087 155.707,82.833
  region net REALY_R1_P6: 155.539,81.97 155.539,82.427 155.326,82.325 155.326,82.071
  region net REALY_R1_P5: 155.125,81.259 154.802,81.582 154.723,81.36 154.902,81.18
  region net MOTOR1_STATUS: 151.094,82.097 151.094,82.554 150.881,82.452 150.881,82.198
  region net MOTOR2_STATUS: 151.856,82.732 151.856,83.189 151.643,83.087 151.643,82.833
  region net MOTOR2_IN1: 151.602,84.002 151.602,84.459 151.389,84.357 151.389,84.103
  region net MOTOR1_PWM: 144.998,89.463 144.998,89.92 144.785,89.818 144.785,89.564
  region net MOTOR2_PWM: 144.363,88.828 144.363,89.285 144.15,89.183 144.15,88.929
  region net MOTOR1_IN2: 144.363,87.558 144.363,88.015 144.15,87.913 144.15,87.659
  region net MOTOR1_IN1: 144.998,88.193 144.998,88.65 144.785,88.548 144.785,88.294
  region net MOTOR1_PWM: 76.06,103.941 76.06,104.398 76.239,104.296 76.239,104.042
  region net MOTOR2_PWM: 63.397,103.516 63.073,103.838 63.296,103.918 63.476,103.738
  region net MOTOR1_STATUS: 76.772,79.225 77.23,79.225 77.128,79.438 76.874,79.438
  region net MOTOR2_STATUS: 55.944,79.225 56.402,79.225 56.3,79.438 56.046,79.438
  region net MOTOR2_IN2: 55.842,103.68 55.519,103.357 55.742,103.278 55.921,103.458
  region net MOTOR2_IN1: 58.698,103.68 58.374,103.357 58.597,103.278 58.777,103.457
  region net MOTOR1_IN2: 68.034,103.68 67.711,103.357 67.934,103.278 68.113,103.458
  region net MOTOR1_IN1: 72.795,103.807 72.471,103.484 72.694,103.405 72.874,103.584
  region net MOTOR_Y8: 146.362,120.006 146.039,120.329 145.873,120.194 146.226,119.84
  region net MOTOR_Y7: 143.348,120.539 143.347,120.082 143.133,120.061 143.135,120.561
  region net MOTOR_Y6: 140.647,120.006 140.324,120.329 140.158,120.193 140.511,119.84
  region net MOTOR_Y5: 137.605,120.09 138.063,120.09 138.084,119.877 137.584,119.877
  region net MOTOR_Y4: 134.684,120.09 135.142,120.09 135.163,119.877 134.663,119.877
  region net MOTOR_Y3: 131.963,120.03 132.398,120.17 132.496,119.977 131.996,119.816
  region net MOTOR_Y8: 138.367,114.785 138.825,114.785 138.846,114.998 138.346,114.998
  region net MOTOR_Y7: 137.097,114.785 137.555,114.785 137.576,114.998 137.076,114.998
  region net MOTOR_Y6: 135.827,114.785 136.285,114.785 136.306,114.998 135.806,114.998
  region net MOTOR_Y5: 134.557,114.785 135.015,114.785 135.036,114.998 134.536,114.998
  region net MOTOR_Y4: 133.287,114.785 133.745,114.785 133.766,114.998 133.266,114.998
  region net MOTOR_Y3: 132.017,114.785 132.475,114.785 132.496,114.998 131.996,114.998
  region net MOTOR_Y2: 130.747,114.785 131.205,114.785 131.226,114.998 130.726,114.998
  region net MOTOR_Y2: 129.502,120.312 129.179,119.99 129.314,119.823 129.668,120.177
  region net VDD_5V: 61.074,93.146 61.074,93.603 61.287,93.624 61.287,93.124
  region net VDD_5V: 60.67,93.146 60.67,93.603 60.457,93.624 60.457,93.124
  region net VDD_5V: 79.593,93.146 79.593,93.603 79.38,93.624 79.38,93.124
  region net VDD_5V: 75.425,93.146 75.425,93.603 75.638,93.624 75.638,93.124
  region net VDD_5V: 75.021,93.146 75.021,93.603 74.808,93.624 74.808,93.124
  region net VDD_5V: 70.472,93.146 70.472,93.603 70.685,93.624 70.685,93.124
  region net VDD_5V: 70.068,93.146 70.068,93.603 69.855,93.624 69.855,93.124
  region net VDD_5V: 65.9,93.146 65.9,93.603 66.113,93.624 66.113,93.124
  region net VDD_5V: 65.496,93.146 65.496,93.603 65.283,93.624 65.283,93.124
  region net VDD_5V: 56.502,93.146 56.502,93.603 56.715,93.624 56.715,93.124
  region net U11_2: 118.047,105.238 118.505,105.238 118.526,105.024 118.026,105.024
  region net U11_2: 110.96,96.911 110.637,97.234 110.773,97.4 111.126,97.047
  region net MOTOR_CTL_X_EN: 109.405,96.753 109.082,97.076 108.916,96.94 109.269,96.587
  region net MOTOR_CTL_X_E: 116.009,95.61 115.686,95.933 115.52,95.797 115.873,95.444
  region net MOTOR_CTL_X_E: 93.18,97.076 92.857,96.753 92.993,96.587 93.346,96.94
  region net MOTOR_CTL_X_EN: 94.45,97.076 94.127,96.753 94.263,96.587 94.616,96.94
  region net U9_1: 101.918,105.873 102.376,105.873 102.397,105.659 101.897,105.659
  region net U9_1: 95.618,96.829 95.618,97.286 95.831,97.307 95.831,96.807
  region net VDD_3V3: 162.143,68.889 162.143,69.346 161.93,69.367 161.93,68.867
  region net VDD_3V3: 154.546,68.889 154.546,69.346 154.759,69.367 154.759,68.867
  region net J_NTRST: 147.451,111.459 146.996,111.016 147.404,110.881 147.586,111.058
  region net Y1: 130.379,136.379 129.129,136.379 129.504,135.998 130.004,135.998
  region net SW1: 157.049,136.379 155.799,136.379 156.174,135.629 156.674,135.629
  rectangle net U3_8: 106.084,92.485 115.355,94.263
  rectangle net L3_1: 105.703,78.388 114.466,80.166

## Silkscreen, mask and mechanical layers (free items; w line width, h text height)
Top Overlay:
  text "J4-1" at 184.022,137.205 h1 r10
  text "J4-2" at 189.855,137.203 h1 r9
  text "J3-1" at 174.029,137.197 h1
  text "J3-2" at 179.998,137.197 h1
  text "PE" at 53.633,134.276 h1
  text "GND" at 57.062,134.276 h1
  text "24V" at 61.126,134.276 h1
  text "X2" at 87.415,132.979 h0.8
  text "X4" at 91.474,132.979 h0.8
  text "X6" at 95.571,132.979 h0.8
  text "X8" at 99.594,132.979 h0.8
  text "X10" at 104.56,132.979 h0.8
  text "X12" at 108.134,132.979 h0.8
  text "X14" at 112.614,132.979 h0.8
  text "X16" at 117.133,132.979 h0.8
  text "Y2" at 128.944,132.979 h0.8
  text "Y4" at 132.5,132.979 h0.8
  text "Y6" at 138.215,132.979 h0.8
  text "Y8" at 141.644,132.979 h0.8
  text "I06" at 193.452,132.871 h1 r90
  text "SW2" at 155.233,132.852 h0.8
  text "SW4" at 158.408,132.852 h0.8
  text "SW6" at 164.885,132.852 h0.8
  text "SW8" at 168.06,132.852 h0.8
  text "24V" at 70.524,132.752 h1
  text "24V" at 77.509,132.752 h1
  text "Y1" at 128.944,131.963 h0.8
  text "Y5" at 138.215,131.963 h0.8
  text "Y7" at 141.644,131.963 h0.8
  text "Y3" at 132.627,131.836 h0.8
  text "X1" at 87.542,131.709 h0.8
  text "X3" at 91.42,131.709 h0.8
  text "X5" at 95.625,131.709 h0.8
  text "X7" at 99.83,131.709 h0.8
  text "X9" at 104.035,131.709 h0.8
  text "X11" at 108.205,131.709 h0.8
  text "X13" at 112.506,131.709 h0.8
  text "X15" at 117.133,131.709 h0.8
  text "SW1" at 155.233,131.709 h0.8
  text "SW3" at 158.408,131.709 h0.8
  text "SW5" at 164.885,131.709 h0.8
  text "SW7" at 168.187,131.709 h0.8
  text "GND" at 70.651,131.355 h1
  text "GND" at 77.382,131.228 h1
  text "I05" at 193.325,128.172 h1 r90
  text "I04" at 193.452,124.489 h1 r90
  text "I03" at 192.944,120.806 h1 r90
  text "I02" at 193.325,116.996 h1 r90
  text "I01" at 193.578,113.253 h1 r90
  text "CM1" at 193.452,108.868 h1 r90
  text "20211019" at 66.079,103.431 h3
  text "HX-SMJ01" at 42.965,103.304 h3
  text "GND" at 192.944,102.899 h1 r90
  text "NPN2" at 192.944,98.835 h1 r90
  text "3V3" at 140.882,95.489 h1.5
  text "SIG" at 145.835,95.418 h1.5
  text "NPN1" at 192.944,94.771 h1 r90
  text "IR2" at 192.944,91.469 h1 r90
  text "PNP2" at 192.944,87.151 h1 r90
  text "5V" at 126.15,85.385 h1.5
  text "3V3" at 139.866,85.131 h1.5
  text "PNP1" at 193.071,83.087 h1 r90
  text "IR1" at 192.944,80.039 h1 r90
  text "24V" at 193.071,75.594 h1 r90
  text "TX1" at 192.944,69.244 h1 r90
  text "RX1" at 192.944,65.688 h1 r90
  text "12V" at 112.688,62.652 h1.5
  text "GND" at 193.071,61.497 h1 r90
  text "K1" at 137.001,58.334 h1 r61
  text "DO4.1" at 113.831,58.203 h1
  text "DO4.2" at 118.657,58.203 h1
  text "DO3.1" at 165.266,58.203 h1
  text "DO3.2" at 170.346,58.203 h1
  text "K2" at 140.378,58.148 h1 r31
  text "K4" at 148.183,58.101 h1 r18
  text "K3" at 143.93,58.076 h1
  text "K5" at 152.058,58.076 h1
  text "K6" at 155.995,58.076 h1
  text "24V" at 131.484,57.949 h1
  text "GND" at 178.191,57.949 h1
  text "RX2" at 182.386,57.949 h1
  text "TX2" at 186.729,57.949 h1
  text "DO1.1" at 55.919,57.822 h1
  text "DO1.2" at 64.809,57.822 h1
  text "DO2.1" at 76.493,57.822 h1
  text "DO2.2" at 85.002,57.822 h1
Bottom Overlay:
  lines w0.5 net S$149457: 41.949,113.882 74.521,113.882 75.731,115.091 75.731,130.458 80.176,134.903 80.176,145.178
  lines w0.5 net S$149459: 85.2,145.178 85.2,134.776 120.435,134.776 120.435,145.178
  lines w0.5 net S$149461: 127.046,145.178 127.046,134.649 145.073,134.649 145.073,145.178 ; 153.716,145.178 153.716,134.649 171.743,134.649 171.743,145.178
Top Solder:
  rectangle: 81.543,66.825 84.464,78.128
  rectangle: 80.146,69.873 85.607,75.588
  rectangle: 60.715,66.825 63.636,78.128
  rectangle: 59.318,69.873 64.779,75.588
Bottom Solder:
  rectangle: 106.973,71.022 109.767,76.356
  rectangle: 107.1,84.992 109.894,90.326
  region: 54.903,64.799 54.903,74.959 58.459,78.515 88.431,78.515 88.431,64.799
Document:
  lines w0.003: 124.689,93.764 124.739,93.815

## Text inside footprints (layer, text, board x,y; h text height)
SW1: Top Overlay "NO" at 97.829,56.596 h0.8; Top Overlay "1" at 99.353,52.824 h0.8 r180; Top Overlay "2" at 101.893,52.824 h0.8 r180; Top Overlay "3" at 104.433,52.824 h0.8 r180; Top Overlay "4" at 107.202,52.752 h0.8 r145